# Altium PCB PCB.PcbDoc
Units mm, origin at the board's own origin, x right, y up, seen from the top; angles counter-clockwise.
Board outline 90 x 77.44 mm, 2 copper layers (Top Layer, Bottom Layer); 78 components, 54 nets, 235 pads, 64 vias.
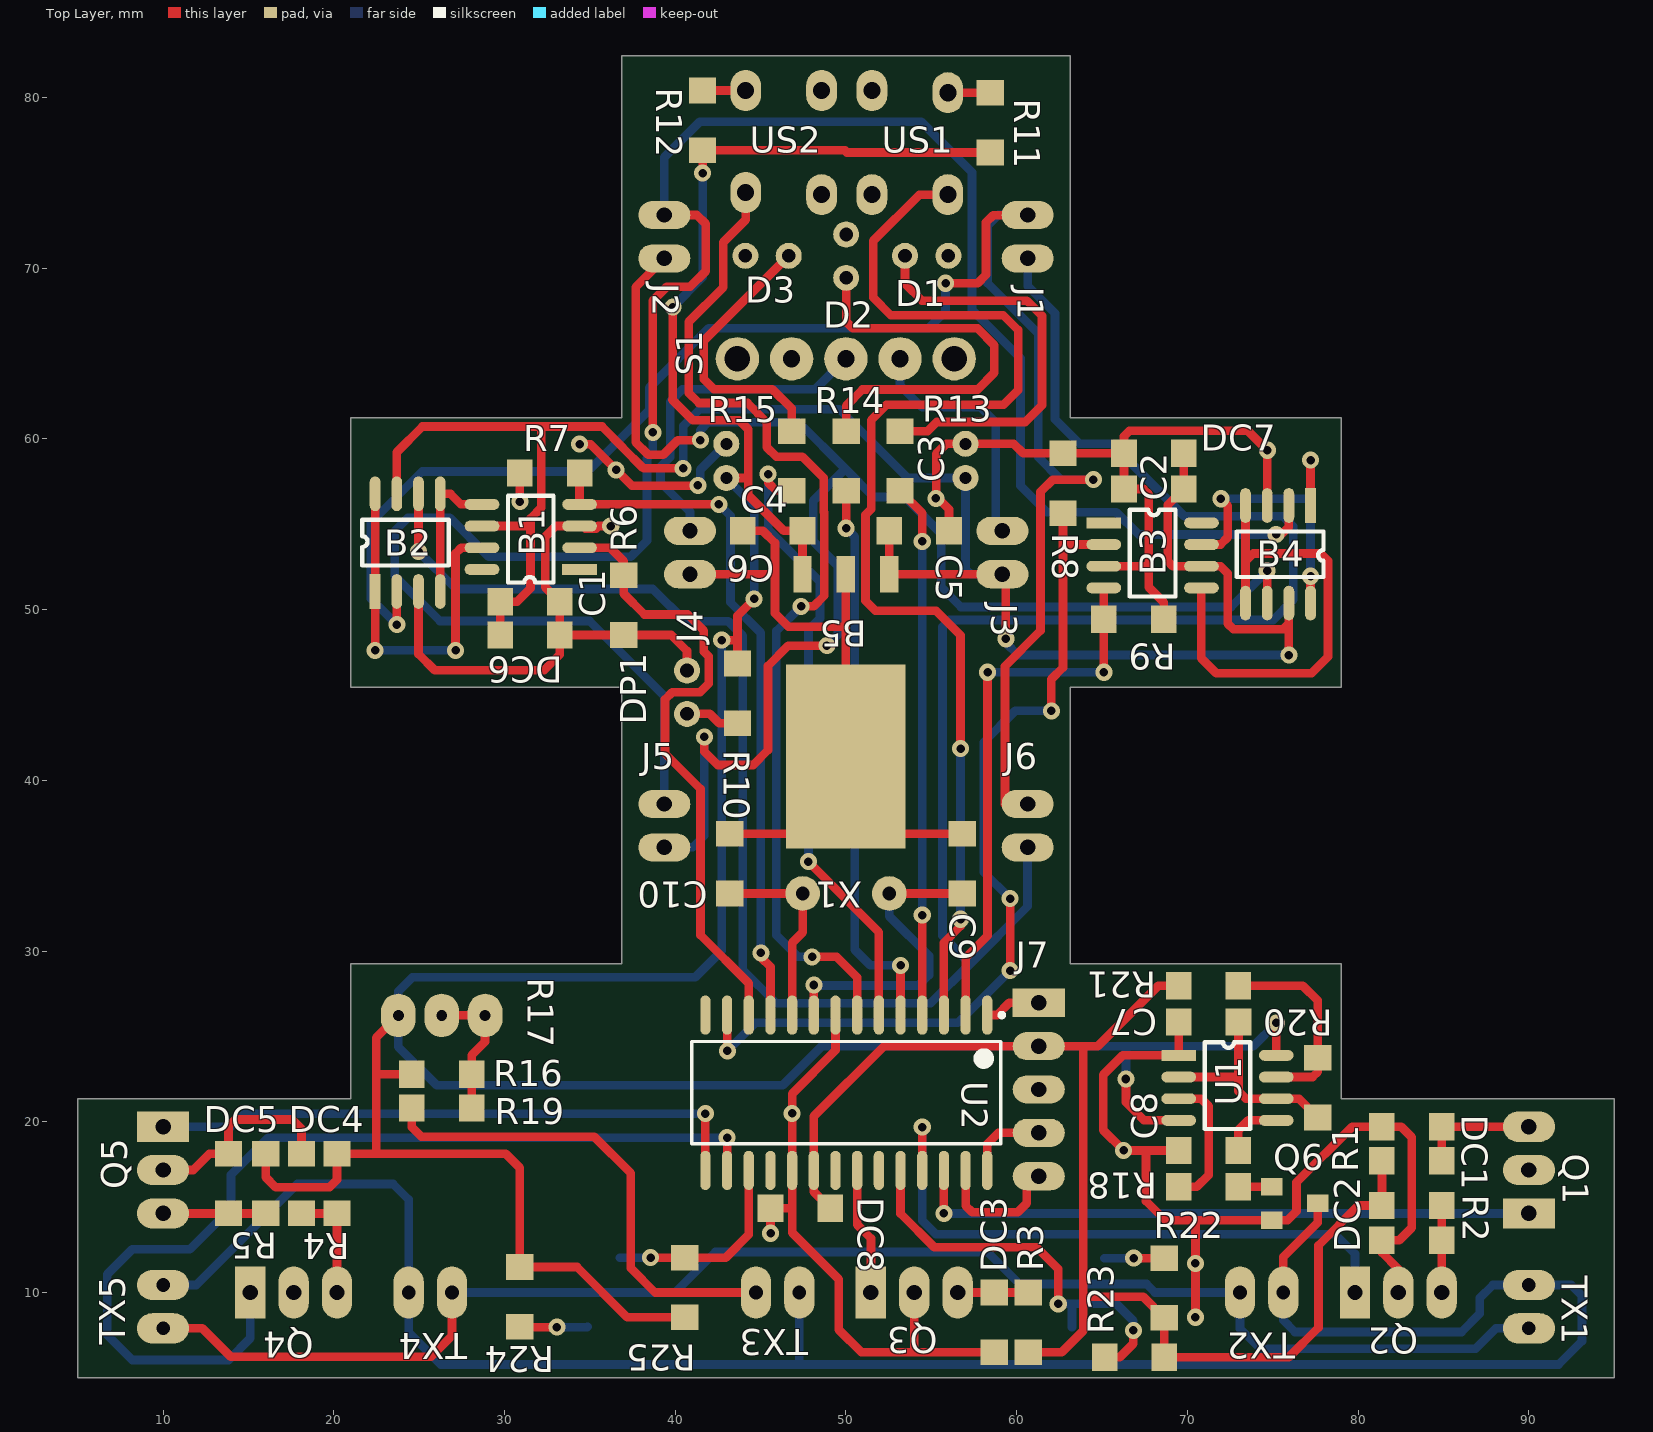
[diagram p0: Top Layer view]
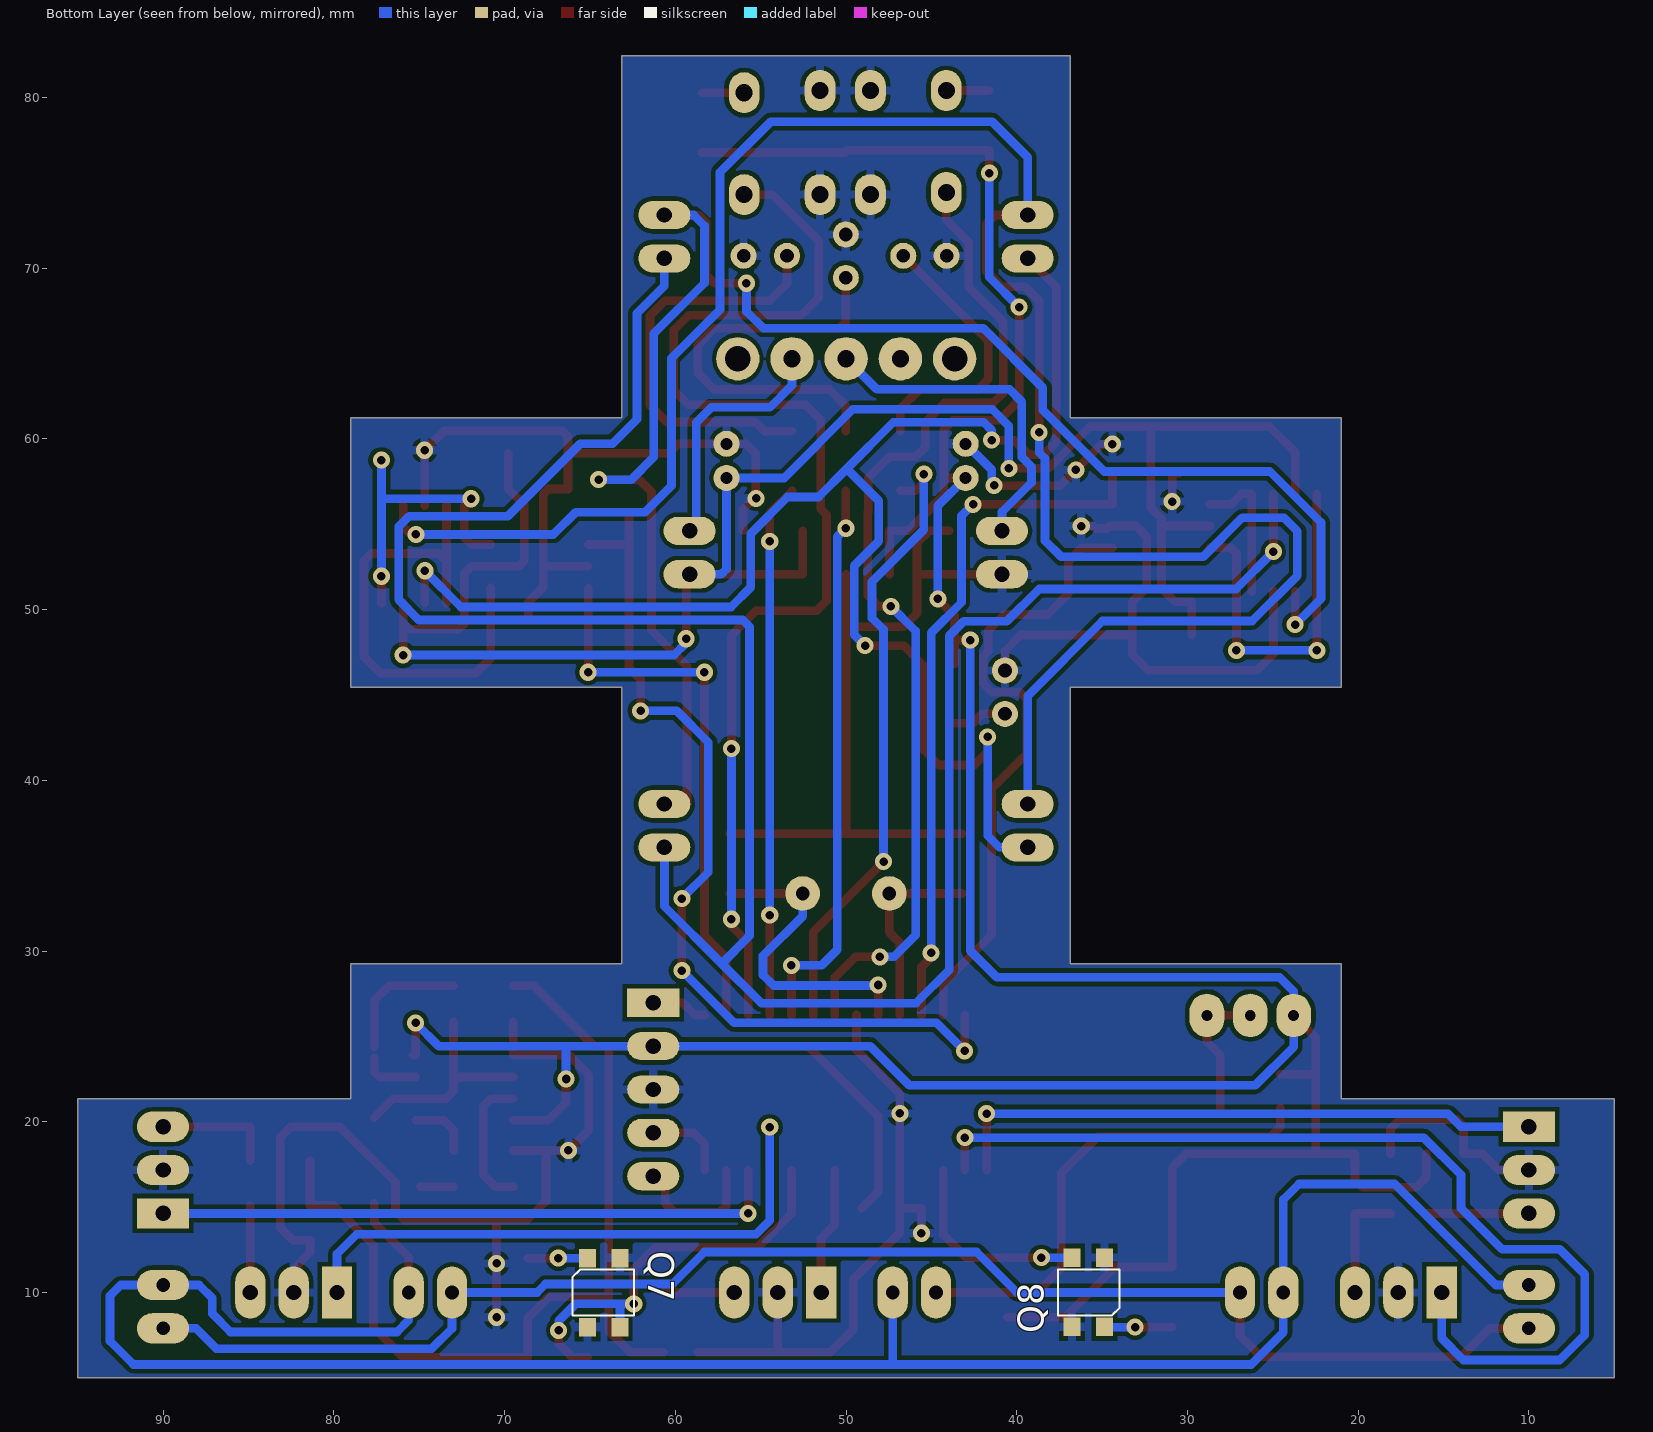
[diagram p1: Bottom Layer view, seen from below]
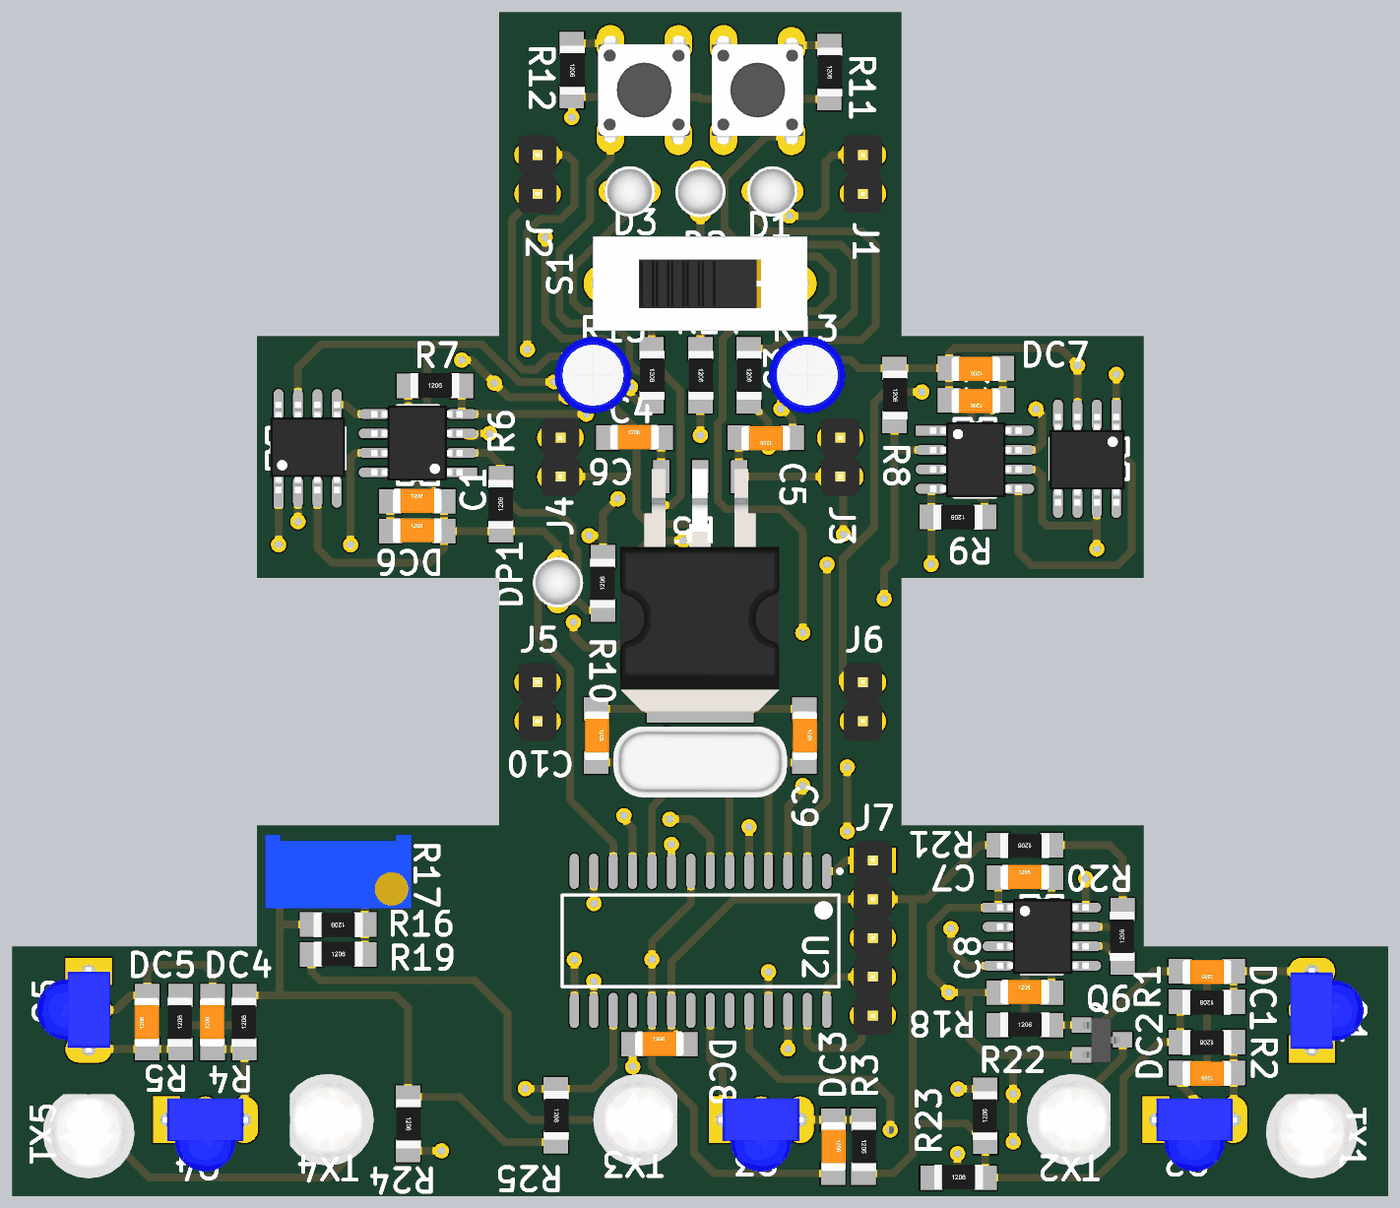
[diagram p2: 3D render of the assembled board from above, using the file's embedded part models]

## Layer stack, top to bottom
Top Solder: solder mask 0.0102, Solder Resist, Dk 3.5
Top Layer: signal copper 0.0356
Dielectric 1: dielectric 0.32, FR-4, Dk 4.8
Bottom Layer: signal copper 0.0356
Bottom Solder: solder mask 0.0102, Solder Resist, Dk 3.5

## Board outline
5,5 5,21.34 21,21.34 21,29.24 36.86,29.24 36.86,45.44 21,45.44 21,61.24 36.86,61.24 36.86,82.44 63.14,82.44 63.14,61.24 79,61.24 79,45.44 63.14,45.44 63.14,29.24 79,29.24 79,21.34 95,21.34 95,5

## Design rules (kind name [scope] priority, off if disabled: settings)
Clearance [All] p1: gap=0.254
HoleSize [All] p1: absolutevalues=TRUE maxlimit=6.3 minlimit=0.2 maxpercent=80.000 minpercent=20.000
MinimumAnnularRing [All] p1: minimumring=0.076
PlaneConnect [All] p1: planeconnectstyle=Relief reliefexpansion=0.508 reliefentries=4 reliefconductorwidth=0.508 reliefairgap=0.254
PolygonConnect [All] p1: connectstyle=Relief reliefconductorwidth=0.508 reliefentries=4 polygonreliefangle="90 Angle" airgapwidth=0.254
RoutingVias [All] p1: holewidth=0.5 width=1 viastyle="Through Hole" minholewidth=0.2 minwidth=0.45 maxholewidth=1 maxwidth=1.27
SolderMaskExpansion [All] p1: expansion=0.102
Width [All] p1: maxlimit=1.27 minlimit=0.127 preferedwidth=0.508
28 further rules are at their usual default settings.

## Components (designator, comment, footprint, x,y, rotation, side; value= is the part's Value field where it differs from the comment)
B1 "IX4427" SOIC-8 39.856,52.35 r180 top
B2 "ZXMHC3F381N8" SOIC-8 22.42,45.599 r90 top
B3 "IX4427" SOIC-8 59.644,55.08 r0 top
B4 "ZXMHC3F381N8" SOIC-8 77.21,61.556 r270 top
B5 "LM2940" TO-263 49.99,44.444 r180 top
C1 "CAP-CER" C1206 31.49,50.45 r0 top
C2 "CAP-CER" C1206 68.03,57.06 r180 top
C3 "CAP-ELEC" CAP-ELEC-5x11x2mm 57,58.71 r90 top
C4 "CAP-ELEC" CAP-ELEC-5x11x2mm 42.99,58.71 r90 top
C5 "CAP-CER" C1206 54.28,54.61 r180 top
C6 "CAP-CER" C1206 45.7,54.61 r0 top
C7 "CAP-CER" C1206 71.24,25.84 r0 top
C8 "CAP-CER" C1206 71.23,18.32 r0 top
C9 "CAP-CER" C1206 56.81,35.12 r270 top
C10 "CAP-CER" C1206 43.2,35.12 r270 top
D1 "LED" LED-3MM-RED 54.725,70.72 r0 top
D2 "LED" LED-3MM-YELLOW 50.01,70.7 r90 top
D3 "LED" LED-3MM-GREEN 45.375,70.72 r180 top
DC1 "CAP-CER" C1206 83.14,19.71 r180 top
DC2 "CAP-CER" C1206 83.14,13.06 r180 top
DC3 "CAP-CER" C1206 58.69,8.25 r270 top
DC4 "CAP-CER" C1206 18.11,16.38 r90 top
DC5 "CAP-CER" C1206 13.83,16.38 r90 top
DC6 "CAP-CER" C1206 31.49,48.51 r0 top
DC7 "CAP-CER" C1206 68.03,59.15 r180 top
DC8 "CAP-CER" C1206 47.33,14.94 r0 top
DP1 "LED" LED-3MM-RED 40.69,45.16 r90 top
J1 "MOTOR DERECHO 1" "HEADER 1x2" 60.64,71.84 r0 top
J2 "MOTOR IZQUIERDO 1" "HEADER 1x2" 39.36,71.84 r0 top
J3 "BATERIA 1" "HEADER 1x2" 59.16,53.34 r180 top
J4 "BATERIA 2" "HEADER 1x2" 40.86,53.34 r0 top
J5 "MOTOR IZQUIERDO 2" "HEADER 1x2" 39.36,37.34 r0 top
J6 "MOTOR DERECHO 2" "HEADER 1x2" 60.64,37.34 r0 top
J7 "PICkit" "Header 1x5" 61.29,26.97 r0 top
Q1 "TSSP58038" TSSP58038 90,14.63 r180 top
Q2 "TSSP58038" TSSP58038 79.81,10 r90 top
Q3 "TSSP58038" TSSP58038 51.46,10 r90 top
Q4 "TSSP58038" TSSP58038 15.11,10 r90 top
Q5 "TSSP58038" TSSP58038 10,19.71 r0 top
Q6 "MMBT2222A" SOT-23 78.138,22.215 r270 top
Q7 "QRE1113GR" QRE1113GR 64.175,10 r270 bottom
Q8 "QRE1113GR" QRE1113GR 35.825,10 r90 bottom
R1 "RES" R1206 83.14,17.71 r180 top
R2 "RES" R1206 83.14,15.09 r180 top
R3 "RES" R1206 60.68,8.25 r270 top
R4 "RES" R1206 20.19,16.38 r90 top
R5 "RES" R1206 16.01,16.38 r90 top
R6 "RES" R1206 36.98,50.26 r90 top
R7 "RES" R1206 32.645,58 r0 top
R8 "RES" R1206 62.71,57.4 r270 top
R9 "RES" R1206 66.855,49.44 r180 top
R10 "RES" R1206 43.64,45.09 r90 top
R11 "RES" R1206 58.44,78.523 r270 top
R12 "RES" R1206 41.6,78.65 r270 top
R13 "RES" R1206 53.165,58.7 r270 top
R14 "RES" R1206 50.01,58.7 r270 top
R15 "RES" R1206 46.815,58.7 r270 top
R16 "RES" R1206 26.32,22.78 r180 top
R17 "POT" TRIMPOT 26.32,26.23 r180 top
R18 "RES" R1206 71.23,16.19 r0 top
R19 "RES" R1206 26.32,20.81 r0 top
R20 "RES" R1206 77.63,22 r90 top
R21 "RES" R1206 71.23,27.97 r180 top
R22 "RES" R1206 68.645,10.26 r90 top
R23 "RES" R1206 66.895,6.21 r0 top
R24 "RES" R1206 30.89,9.74 r270 top
R25 "RES" R1206 40.55,10.29 r270 top
S1 "SLIDE-SWITCH" SWITCH 49.99,64.69 r180 top
TX1 "LED" LED-5MM-CLEAR 90,9.17 r90 top
TX2 "LED" LED-5MM-CLEAR 74.35,10 r0 top
TX3 "LED" LED-5MM-CLEAR 46,10 r0 top
TX4 "LED" LED-5MM-CLEAR 25.65,10 r180 top
TX5 "LED" LED-5MM-CLEAR 10,9.17 r90 top
U1 "555" SOIC-8 64.024,23.89 r0 top
U2 "PIC18F2550" SOIC-SO28_N 50.02,21.7 r270 top
US1 "BUTTON" TACT_SWITCH-SMALL-4PIN 55.965,74.304 r90 top
US2 "BUTTON" TACT_SWITCH-SMALL-4PIN 44.125,80.4 r270 top
X1 "XTAL" HC-49/S 50,33.37 r0 top

## Footprints (in the part's own frame and the unit in brackets; to place one, negate y for a bottom-side part, rotate by r counter-clockwise, add the part's x,y. Pads: shape width x height; smd on the part's side, far side on the other; paste and mask are expansions set on the pad)
C1206 [mm]
  rect 1.5x1.6 smd: 1(-1.75,0) 2(1.75,0)
  body extent -1.6,-0.76 1.6,0.84, height 1.26
CAP-ELEC-5x11x2mm [mm]
  round 1.524 hole 0.7: 1(-1,0) 2(1,0)
  body extent -2.53,-2.53 2.52,2.53, height 11.53
HC-49/S [mil]
  round 80 hole 31.5: 1(-100,0) 2(100,0)
  body extent -223,-90 223,93, height 138
"HEADER 1x2" [mil]
  oval 120x65 hole 35.43: 1(0,50) 2(0,-50)
  body extent -49,-100 49,100, height 336
"Header 1x5" [mil]
  rect 120x65 hole 35.43: 1(0,0)
  oval 120x65 hole 35.43: 2(0,-100) 3(0,-200) 4(0,-300) 5(0,-400)
  body extent -49,-450 49,50, height 336
LED-3MM-GREEN [mil]
  round 60 hole 31.5: A(-50,0) K(50,0)
  body extent -66,-65 64,65, height 217
LED-3MM-RED [mil]
  round 60 hole 31.5: A(-50,0) K(50,0)
  body extent -66,-65 64,65, height 217
LED-3MM-YELLOW [mil]
  round 60 hole 31.5: A(-50,0) K(50,0)
  body extent -66,-65 64,65, height 217
LED-5MM-CLEAR [mil]
  oval 70x120 hole 31.5: A(-50,0) K(50,0)
  body extent -118,-118 98,118, height 346
QRE1113GR [mm]
  rect 1.1x1 smd: A(-2.01,-0.97) C(2.04,0.94) E(-2.01,0.94) K(2.04,-0.97)
  silkscreen extent -1.35,-1.85 1.35,1.75, body extent -2.4,-1.8 2.4,1.8, height 1.83
R1206 [mm]
  rect 1.5x1.6 smd: 1(-1.75,0) 2(1.75,0)
  body extent -1.6,-0.76 1.6,0.84, height 0.68
SOIC-8 [mil]
  rect 80x25 smd: 1(215,0)
  oval 80x25 smd: 2(215,-50) 3(215,-100) 4(215,-150) 5(440,-150) 6(440,-100) 7(440,-50) 8(440,0)
  silkscreen extent 275,-170 380,30, body extent 212,-171 448,21, height 69
SOIC-SO28_N [mm] "SOIC, 28-Leads, Body 17.9x7.5mm, Pitch 1.27mm, IPC Medium Density"
  oval 2.3x0.6 smd: 1(-4.55,8.255) 2(-4.55,6.985) 3(-4.55,5.715) 4(-4.55,4.445) 5(-4.55,3.175) 6(-4.55,1.905) 7(-4.55,0.635) 8(-4.55,-0.635) 9(-4.55,-1.905) 10(-4.55,-3.175) 11(-4.55,-4.445) 12(-4.55,-5.715) 13(-4.55,-6.985) 14(-4.55,-8.255) 15(4.55,-8.255) 16(4.55,-6.985) 17(4.55,-5.715) 18(4.55,-4.445) 19(4.55,-3.175) 20(4.55,-1.905) 21(4.55,-0.635) 22(4.55,0.635) 23(4.55,1.905) 24(4.55,3.175) 25(4.55,4.445) 26(4.55,5.715) 27(4.55,6.985) 28(4.55,8.255)
  silkscreen extent -4.67,-9.05 3,9.23, body extent -3.8,-9.06 3.8,9.06, height 2.65
SOT-23 [mil]
  rect 40x50 smd: B(237.2,-125.99) C(275,-20) E(313.98,-125.99)
  body extent 218,-124 333,-27, height 38
SWITCH [mm]
  round 2.54 hole 1: 1(-3.175,0) 2(0,0) 3(3.175,0)
  round 2.54 hole 1.5: 4(-6.35,0) 4(6.35,0)
  body extent -7,-3.1 7,3.1, height 9.65
TACT_SWITCH-SMALL-4PIN [mm]
  oval 2.4x1.8 hole 1: 1(0,4.445) 1(6.096,4.445) 2(0,0) 2(5.969,0)
  body extent -0.94,-0.79 7.04,5.21, height 5.15
TO-263 [mil]
  rect 42x85 smd: 1(-100,-300.25) 2(0,-300.25) 3(100,-300.25)
  rect 275x425 smd: 2(0,120.25)
  body extent -204,-320 205,304, height 181
TRIMPOT [mil]
  oval 80x100 hole 25: 1(-100,0) 2(0,0) 3(100,0)
  body extent -188,-94 188,94, height 455
TSSP58038 [mil]
  rect 120x70 hole 35.43: 1(0,0)
  oval 120x70 hole 35.43: 2(0,-100) 3(0,-200)
  body extent -134,-213 55,15, height 337

## Part data
B1 B3: library part 4427
J1 J2 J3 J4 J5 J6: library part "Header 1x2"
Q6: library part NPN

## Via types
v1: diameter 1, hole 0.5, Top Layer to Bottom Layer, 64 vias

## Nets (pads, with @x,y where several pads share a name; then routed paths per layer and width w, separated by ;. In a path a pad name is that pad's centre, name@x,y a point inside that pad or via, vN(x,y) a via of type N, cw(c..) or ccw(c..) an arc to the next point about the centre after c; other vN are vias at no path point)
38K: R18.1 U1.3 | length 8
  Top Layer w0.508: R18.1 70.546,16.19 71.24,16.884 71.24,20.911 70.801,21.35 U1.3
BTN1: R11.1 U2.3 US1.2 | length 74.1
  Top Layer w0.508: U2.3 55.735,30.486 56.71,31.461 v1(56.71,31.86) ; US1.2@55.965,75.184 55.965,74.304 54.304,74.304 51.595,71.595 51.595,68.275 52.641,67.23 59.22,67.23 60.08,66.37 60.08,62.85 59.231,62.001 52.375,62.001 51.47,61.097 51.47,55.88 51.14,55.55 51.14,50.52 51.724,49.936 55.27,49.936 56.71,48.497 v1(56.71,41.86) ; US1.2@55.965,80.273 R11.1
  Bottom Layer w0.508: v1(56.71,31.86) v1(56.71,41.86)
BTN2: R12.1 U2.7 US2.2 | length 62.8
  Top Layer w0.508: R12.1 US2.2@44.125,80.4 ; US2.2@44.125,74.447 44.125,74.431 44.125,72.835 42.81,71.52 42.81,68.87 40.79,66.85 40.79,62.69 41.385,62.095 44.229,62.095 45.364,60.96 45.364,59.513 45.923,58.955 47.446,58.955 48.692,57.709 48.692,55.702 48.717,55.702 48.717,50.8 48.108,50.19 v1(47.371,50.19) ; v1(48.01,29.66) 49.443,29.66 50.655,28.448 U2.7
  Bottom Layer w0.508: v1(47.371,50.19) 45.923,48.743 45.923,30.923 47.186,29.66 v1(48.01,29.66)
CNY1: Q7.C R23.1 U2.24 | length 24.7
  Top Layer w0.508: U2.24 53.195,14.63 55.175,12.65 61.162,12.65 62.433,11.379 v1(62.433,9.336) ; R23.1 66.04,6.21 66.83,7 v1(66.83,7.78)
  Bottom Layer w0.508: v1(62.433,9.336) 63.235,9.336 ; Q7.C 63.235,9.336 ; v1(66.83,7.78) 66.83,8.343 65.837,9.336 63.235,9.336
CNY2: Q8.C R25.1 U2.17 | length 11.9
  Top Layer w0.508: v1(38.557,12.04) R25.1 42.95,12.04 44.305,13.395 U2.17
  Bottom Layer w0.508: Q8.C v1(38.557,12.04)
GND: B1.3 B2.3 B3.3 B4.3 B5.2 C1.2 C2.2 C3.2 C4.2 C5.1 C6.1 C7.1 C8.1 C9.1 C10.1 D1.K D2.K D3.K DC1.2 DC2.2 DC3.2 DC4.2 DC5.2 DC6.2 DC7.2 DC8.1 DP1.K J4.2 J7.3 Q1.2 Q2.2 Q3.2 Q4.2 Q5.2 Q6.E Q7.E Q7.K Q8.E Q8.K R6.1 R7.1 R8.1 R9.1 U1.1 U2.8 U2.19 US1.1 US2.1 | length 236.8
  Top Layer w0.508: Q5.2 11.76,17.17 12.72,18.13 DC5.2 13.83,19.73 14.23,20.13 17.57,20.13 18.11,19.59 DC4.2 ; B2.3 24.96,47.4 25.92,46.44 32.31,46.44 33.24,47.37 DC6.2 ; R7.1@30.48,58 R7.1 v1(30.895,56.325) ; v1(34.4,59.69) 35.03,59.69 v1(36.54,58.18) 37.46,57.26 41.32,57.26 v1(41.33,57.27) ; v1(36.22,54.89) 35.502,54.89 35.36,54.748 34.729,54.748 34.587,54.89 B1.3 33,54.89 32.38,54.27 32.38,51.31 C1.2 DC6.2 ; DP1.K 40.69,47.577 39.757,48.51 R6.1 DC6.2 ; J4.2 45.84,52.07 ; C10.1 B5.2@49.99,36.87 ; C6.1 45.13,54.61 45.84,53.9 45.84,52.07 ; v1(45.58,13.47) DC8.1 46.845,14.94 ; U2.8 49.385,24.185 46.845,21.645 U2.19 46.845,14.94 ; B5.2@49.99,52.07 49.99,48.99 ; Q3.2 54,6.5 ; C5.1 56.03,55.87 55.29,56.61 55.29,59.12 55.88,59.71 C3.2 59.816,59.71 60.376,59.15 R8.1 DC7.2 ; C9.1 B5.2@49.99,36.87 ; DC3.2 54,6.5 ; B3.3 67.73,52.54 ; R9.1 68.605,50.435 67.73,51.31 67.73,52.54 ; C8.1 67.57,18.32 ; C7.1 69.485,25.835 U1.1 66.206,23.89 65.075,22.758 65.075,19.507 v1(66.262,18.32) 67.57,18.32 ; v1(70.47,8.55) v1(70.47,11.7) 70.47,14.24 ; B4.3 74.67,59.334 73.527,60.477 66.61,60.477 66.28,60.147 DC7.2 ; Q2.2 82.35,11.38 81.39,12.34 DC2.2 82.41,13.06 83.14,13.79 83.14,19.1 82.53,19.71 DC1.2 79.65,19.71 76.39,16.45 76.39,14.76 75.87,14.24 Q6.E 70.47,14.24 ; 45.84,52.07 45.84,49.783 46.633,48.99 49.99,48.99 ; 46.845,14.94 46.845,13.505 49.581,10.769 49.581,7.823 50.904,6.5 54,6.5 ; B5.2@49.99,36.87 49.99,41.389 49.99,48.99 ; DC7.2 C2.2 67.43,57.06 67.73,56.76 67.73,52.54 ; 67.57,18.32 67.57,15.36 68.69,14.24 70.47,14.24
  Bottom Layer w0.508: v1(41.33,57.27) 41.47,57.41 41.47,58.19 C4.2
  other v1: 46.84,20.49 55.27,56.51 74.68,59.33
IR1: Q1.1 U2.26 | length 36.8
  Top Layer w0.508: v1(55.735,14.63) U2.26
  Bottom Layer w0.508: v1(55.735,14.63) Q1.1
IR2: Q2.1 U2.25 | length 36.4
  Top Layer w0.508: U2.25 v1(54.465,19.682)
  Bottom Layer w0.508: v1(54.465,19.682) 54.465,14.215 55.26,13.42 78.64,13.42 79.81,12.25 Q2.1
IR3: Q3.1 U2.22 | length 7.5
  Top Layer w0.508: U2.22 50.655,13.962 51.46,13.157 Q3.1
IR4: Q4.1 U2.16 | length 58.4
  Top Layer w0.508: U2.16 v1(43.035,19.07)
  Bottom Layer w0.508: Q4.1 15.11,7.315 13.845,6.05 8.19,6.05 6.73,7.51 6.73,11.07 8.19,12.53 11.57,12.53 13.98,14.94 13.98,16.89 16.16,19.07 v1(43.035,19.07)
IR5: Q5.1 U2.15 | length 35.4
  Top Layer w0.508: U2.15 v1(41.765,20.472)
  Bottom Layer w0.508: Q5.1 13.98,19.71 14.742,20.472 v1(41.765,20.472)
LED1: R13.2 U2.4 | length 31.2
  Top Layer w0.508: R13.2 54.465,55.65 v1(54.465,53.993) ; U2.4 v1(54.465,32.106)
  Bottom Layer w0.508: v1(54.465,32.106) v1(54.465,53.993)
LED2: R14.2 U2.5 | length 33.1
  Top Layer w0.508: v1(50.01,54.762) R14.2 ; U2.5 v1(53.195,29.159)
  Bottom Layer w0.508: v1(50.01,54.762) 50.513,54.26 50.513,30.074 51.427,29.159 v1(53.195,29.159)
LED3: R15.2 U2.6 | length 37
  Top Layer w0.508: v1(45.441,57.937) 45.441,57.433 45.923,56.95 R15.2 ; v1(47.802,35.232) 51.925,31.109 U2.6
  Bottom Layer w0.508: v1(45.441,57.937) 45.441,54.669 48.48,51.63 48.48,49.51 47.802,48.832 v1(47.802,35.232)
MD_DIR: B1.4 R7.2 U2.11 | length 41.2
  Top Layer w0.508: R7.2 B1.4 v1(42.56,56.16) ; v1(45.01,29.89) 45.01,29.641 45.575,29.076 U2.11
  Bottom Layer w0.508: v1(42.56,56.16) 43.23,55.49 43.23,50.42 45.01,48.64 v1(45.01,29.89)
MD_PWM: B1.2 R6.2 U2.12 | length 37.1
  Top Layer w0.508: B1.2 36.192,53.62 36.98,52.832 36.98,50.929 38.202,49.708 40.724,49.708 41.664,48.768 41.664,47.549 41.961,47.252 41.961,45.668 41.453,45.16 39.827,45.16 39.395,44.728 39.395,41.575 41.481,39.489 41.481,30.939 44.305,28.115 U2.12
MI_DIR: B3.4 R9.2 U2.2 | length 32.4
  Top Layer w0.508: U2.2 57.005,29.598 58.293,30.886 v1(58.293,46.33) ; v1(65.105,46.33) R9.2 B3.4
  Bottom Layer w0.508: v1(58.293,46.33) v1(65.105,46.33)
MI_PWM: B3.2 R8.2 U2.13 | length 53.6
  Top Layer w0.508: U2.13 43.035,24.165 v1(43.05,24.15) ; v1(59.614,28.854) v1(59.614,33.071) ; v1(62.027,44.069) 62.027,45.923 62.71,46.606 62.71,53.81 ; R8.2 62.71,53.81 ; B3.2 62.71,53.81
  Bottom Layer w0.508: v1(43.05,24.15) 44.69,25.79 56.549,25.79 v1(59.614,28.854) ; v1(59.614,33.071) 58.06,34.625 58.06,42.21 59.919,44.069 v1(62.027,44.069)
NetB1_5: B1.5 B2.4 B2.5 | length 8.4
  Top Layer w0.508: B2.4 B2.5 26.835,56.775 27.45,56.16 B1.5
NetB1_7: B1.7 B2.1 B2.8 | length 21.2
  Top Layer w0.508: v1(22.42,47.61) B2.1 B2.8 ; v1(27.13,47.61) 27.13,53.28 27.47,53.62 B1.7
  Bottom Layer w0.508: v1(22.42,47.61) v1(27.13,47.61)
NetB2_2: B2.2 J1.1 J6.1 | length 103
  Top Layer w0.508: v1(23.69,49.12) B2.2 ; v1(55.829,69.113) 57.709,69.113 58.2,69.605 58.2,72.68 58.617,73.097 J1.1@60.574,73.097 ; J6.1 59.309,38.61 59.309,46.685 61.392,48.768 61.392,56.896 62.103,57.607 v1(64.491,57.607)
  Bottom Layer w0.508: v1(23.69,49.12) 22.18,50.63 22.18,55.098 25.171,58.09 34.87,58.09 38.47,61.69 38.47,62.99 41.952,66.472 54.839,66.472 55.829,67.462 v1(55.829,69.113) ; J1.1 58.928,73.11 58.29,72.472 58.29,69.13 61.27,66.15 61.27,58.923 62.586,57.607 v1(64.491,57.607)
NetB2_6: B2.6 J1.2 J6.2 | length 139.8
  Top Layer w0.508: B2.6 24.96,53.399 v1(24.968,53.391)
  Bottom Layer w0.508: v1(24.968,53.391) 27.153,51.206 38.684,51.206 40.581,49.309 43.111,49.309 43.96,48.46 43.96,28.89 45.901,26.949 54.966,26.949 57.277,29.261 ; J6.2 60.63,36.07 60.63,32.614 57.277,29.261 ; J1.2 60.64,68.95 62.24,67.35 62.24,61.153 63.673,59.72 65.57,59.72 69.816,55.474 75.59,55.474 76.198,54.866 76.198,50.569 75.019,49.39 56.045,49.39 55.651,48.997 55.651,30.886 57.277,29.261
NetB3_5: B3.5 B4.4 B4.5 | length 28.8
  Top Layer w0.508: B3.5 70.815,51.27 70.815,47.142 71.692,46.266 77.264,46.266 78.23,47.232 78.23,52.86 77.803,53.287 73.855,53.287 73.4,52.832 ; B4.5 73.4,52.832 ; B4.4 73.4,52.832
NetB3_7: B3.7 B4.1 B4.8 | length 20.9
  Top Layer w0.508: B3.7 71.933,53.81 72.365,54.242 72.365,56.083 v1(71.958,56.49) ; B4.8 v1(77.21,51.95) ; B4.1 v1(77.21,58.75)
  Bottom Layer w0.508: v1(71.958,56.49) 77.21,56.49 ; v1(77.21,51.95) 77.21,56.04 ; v1(77.21,58.75) 77.21,56.49 ; 77.21,56.04 77.21,56.49 ; 77.21,56.04 77.21,56.49
NetB4_2: B4.2 J2.1 J5.1 | length 128.9
  Top Layer w0.508: v1(38.69,60.38) 38.69,68.078 38.684,68.084 39.506,68.906 40.866,68.906 41.78,69.82 41.78,72.59 41.26,73.11 J2.1 ; v1(75.19,54.4) 75.5,54.4 75.94,54.84 B4.2
  Bottom Layer w0.508: v1(38.69,60.38) 38.69,59.2 38.34,58.85 38.34,54.037 37.389,53.086 29.083,53.086 26.799,55.37 24.35,55.37 23.56,54.58 23.56,51.98 26.213,49.327 34.973,49.327 39.36,44.94 J5.1 ; J2.1 39.36,76.5 41.44,78.58 54.414,78.58 57.379,75.616 57.379,67.561 60.22,64.72 60.22,57.255 61.773,55.702 65.837,55.702 67.139,54.4 v1(75.19,54.4)
NetB4_6: B4.6 J2.2 J5.2 | length 93.5
  Top Layer w0.508: J2.2 37.676,68.886 37.676,59.804 38.41,59.07 39.29,59.07 40.14,59.92 v1(41.47,59.92) ; v1(41.707,42.545) 41.707,41.673 42.48,40.9 44.56,40.9 45.43,41.77 45.43,46.696 46.624,47.89 v1(48.88,47.89) ; B4.6 v1(74.67,52.273)
  Bottom Layer w0.508: J5.2 41.01,36.07 41.707,36.767 v1(41.707,42.545) ; v1(41.47,59.92) 41.47,60.51 41.94,60.98 47.218,60.98 49.954,58.244 ; v1(48.88,47.89) 49.51,48.52 49.51,52.573 48.082,54 48.082,56.372 49.954,58.244 ; v1(74.67,52.273) 72.549,50.152 56.738,50.152 55.58,51.31 55.58,54.44 53.429,56.591 51.607,56.591 49.954,58.244
NetC7_2: C7.2 R20.1 U1.2 U1.6 | length 12.8
  Top Layer w0.508: U1.2 72.99,22.62 ; C7.2 72.99,22.62 ; R20.1 76.53,21.35 U1.6 73.43,21.35 72.99,21.79 72.99,22.62
NetC8_2: C8.2 U1.5 | length 3.6
  Top Layer w0.508: C8.2 72.98,19.507 73.553,20.08 U1.5
NetD1_A: D1.A R13.1 | length 24.6
  Top Layer w0.508: R13.1 54.78,60.45 55.315,60.985 60.495,60.985 61.48,61.97 61.48,67.21 60.593,68.097 54.446,68.097 53.455,69.088 D1.A
NetD2_A: D2.A R14.1 | length 24.4
  Top Layer w0.508: R14.1 50.01,61.94 50.96,62.89 57.709,62.89 58.69,63.872 58.69,65.487 57.709,66.468 50.394,66.468 50.01,66.852 D2.A
NetD3_A: D3.A R15.1 | length 16.5
  Top Layer w0.508: D3.A 41.67,65.745 41.67,63.508 42.266,62.912 45.676,62.912 46.815,61.773 R15.1
NetDC1_1: DC1.1 Q1.3 R1.1 | length 7.1
  Top Layer w0.508: R1.1 DC1.1 Q1.3
NetDC2_1: DC2.1 Q2.3 R2.1 | length 5.1
  Top Layer w0.508: Q2.3 DC2.1 R2.1
NetDC3_1: DC3.1 Q3.3 R3.1 | length 4.1
  Top Layer w0.508: Q3.3 DC3.1 R3.1
NetDC4_1: DC4.1 Q4.3 R4.1 | length 6.7
  Top Layer w0.508: DC4.1 R4.1 Q4.3
NetDC5_1: DC5.1 Q5.3 R5.1 | length 6
  Top Layer w0.508: Q5.3 DC5.1 R5.1
NetDP1_A: DP1.A R10.1 | length 3.2
  Top Layer w0.508: DP1.A 42.02,43.89 42.57,43.34 R10.1
NetJ3_2: J3.2 S1.1 | length 14.8
  Bottom Layer w0.508: S1.1 53.165,63.134 54.458,61.842 57.894,61.842 58.776,60.96 58.776,54.61 J3.2
NetJ4_1: J4.1 S1.2 | length 19.9
  Bottom Layer w0.508: J4.1 40.86,55.71 39.13,57.44 39.13,58.362 39.7,58.932 39.7,62.179 40.421,62.9 48.2,62.9 S1.2
NetQ6_B: Q6.B R18.2 | length 2
  Top Layer w0.508: R18.2 Q6.B
NetQ6_C: Q6.C TX1.K TX2.K TX3.K TX4.K TX5.K | length 129.3
  Top Layer w0.508: TX2.K 75.62,12.09 77.63,14.1 Q6.C
  Bottom Layer w0.508: TX5.K 11.939,10.44 17.856,16.358 23.466,16.358 24.38,15.443 TX4.K 24.38,7.67 26.27,5.78 47.27,5.78 ; TX3.K 47.27,5.78 ; TX2.K 75.62,8.37 76.3,7.69 86.049,7.69 87.122,8.763 87.122,9.672 87.89,10.44 TX1.K 92.48,10.44 93.11,9.81 93.11,7.16 91.73,5.78 47.27,5.78
NetQ7_A: Q7.A R22.2 | length 3.5
  Top Layer w0.508: v1(66.853,12.01) R22.2
  Bottom Layer w0.508: Q7.A v1(66.853,12.01)
NetQ8_A: Q8.A R24.2 | length 4
  Top Layer w0.508: R24.2 30.91,7.97 v1(33.07,7.97)
  Bottom Layer w0.508: v1(33.07,7.97) 34.835,7.97 Q8.A
NetR16_1: R16.1 R17.1 R17.2 R19.2 | length 8.3
  Top Layer w0.508: R17.2 R17.1 28.86,24.69 28.07,23.9 R16.1 R19.2
NetR19_1: R19.1 TX3.A | length 28.6
  Top Layer w0.508: R19.1 24.57,19.69 25.14,19.12 35.261,19.12 37.389,16.993 37.389,11.43 38.819,10 TX3.A
NetR20_2: R20.2 R21.1 U1.7 | length 11.1
  Top Layer w0.508: R21.1 76.76,27.97 77.63,27.1 R20.2@77.63,24.406 ; U1.7 77.33,22.62 77.63,22.92 R20.2
NetTX1_A: TX1.A TX2.A TX4.A TX5.A | length 88.8
  Top Layer w0.508: TX5.A 12.29,7.9 13.96,6.23 25.69,6.23 26.92,7.46 TX4.A
  Bottom Layer w0.508: TX4.A 39.99,10 42.36,12.37 58.293,12.37 60.163,10.5 67.6,10.5 68.1,10 TX2.A 73.08,7.895 74.275,6.7 86.87,6.7 88.07,7.9 TX1.A
PGC: J7.5 U2.27 | length 8.3
  Top Layer w0.508: U2.27 57.005,15.085 57.39,14.7 60.06,14.7 60.579,15.219 60.579,16.81 J7.5
PGD: J7.4 U2.28 | length 4.8
  Top Layer w0.508: U2.28 58.275,18.697 58.928,19.35 J7.4
VBAT: B1.6 B2.7 B3.6 B4.7 B5.1 C1.1 C2.1 C3.1 C5.2 DC6.1 DC7.1 J3.1 | length 117
  Top Layer w0.508: B2.7 23.69,59.22 25.19,60.72 32.156,60.72 ; B1.6 31.521,54.89 ; DC6.1 C1.1 30.73,50.45 31.521,51.241 31.521,54.89 ; v1(40.462,58.268) 38.158,58.268 38.118,58.308 38.094,58.308 36.914,59.488 36.914,59.512 35.706,60.72 32.156,60.72 ; C5.2 B5.1 J3.1 59.461,52.07 59.36,51.969 v1(59.36,48.29) ; DC7.1 C2.1 68.84,56.12 68.84,52.84 69.14,52.54 B3.6 71.933,52.54 72.365,52.108 72.365,49.174 72.695,48.844 75.61,48.844 75.94,49.174 ; v1(75.94,47.338) 75.94,49.174 ; B4.7 75.94,49.174 ; 31.521,54.89 31.521,55.335 32.156,55.97 32.156,60.72
  Bottom Layer w0.508: v1(40.462,58.268) 40.462,60.757 41.447,61.742 49.586,61.742 53.618,57.71 C3.1 57,52.372 57.302,52.07 J3.1 ; v1(59.36,48.29) 59.36,48.057 60.079,47.338 v1(75.94,47.338)
VCC: B5.3 C4.1 C6.2 DC8.2 J7.2 R1.2 R2.2 R3.2 R4.2 R5.2 R10.2 R11.2 R12.2 R16.2 R17.3 R21.2 R22.1 R23.2 R24.1 R25.2 U1.4 U1.8 U2.20 | length 292.3
  Top Layer w0.508: R5.2 16.01,16.75 16.59,16.17 19.75,16.17 20.19,16.61 R4.2 22.479,18.13 ; R17.3 22.479,24.929 22.479,22.78 ; R16.2 22.479,22.78 ; v1(39.855,67.71) 39.855,62.323 39.82,62.288 41.021,61.087 43.739,61.087 44.272,60.554 44.272,57.71 ; R25.2 37.189,8.54 34.239,11.49 R24.1 30.89,17.314 30.074,18.13 22.479,18.13 ; v1(41.6,75.565) R12.2 49.936,76.9 50.063,76.773 R11.2 ; v1(42.723,48.209) 43.589,48.209 43.64,48.26 ; C4.1 44.272,57.71 ; R10.2 43.64,48.26 ; v1(44.62,50.62) 43.64,49.64 43.64,48.26 ; B5.3 C6.2 46.36,54.61 44.272,56.698 44.272,57.71 ; DC8.2 48.115,15.905 U2.20 48.115,20.32 52.225,24.43 J7.2 63.9,24.43 ; R3.2 62.634,6.5 63.9,7.766 63.9,9.75 ; v1(66.396,22.504) 66.396,21.133 67.448,20.08 U1.4 ; R21.2 68.286,27.97 64.751,24.43 63.9,24.43 ; v1(75.21,25.79) 75.21,23.9 U1.8 U1.8@75.362,23.89 ; R1.2 R2.2 80.01,15.09 77.673,12.753 77.673,7.95 75.933,6.21 R23.2 R22.1 67.405,9.75 63.9,9.75 ; 22.479,18.13 22.479,22.78 ; 63.9,9.75 63.9,24.43
  Bottom Layer w0.508: v1(39.855,67.71) 41.6,69.455 v1(41.6,75.565) ; v1(42.723,48.209) 42.723,30.013 41.17,28.46 24.605,28.46 23.78,27.635 R17.3 23.78,24.384 26.024,22.14 46.295,22.14 48.585,24.43 J7.2 66.396,24.43 ; C4.1 44.62,56.08 v1(44.62,50.62) ; v1(66.396,22.504) 66.396,24.43 ; v1(75.21,25.79) 73.85,24.43 66.396,24.43
VPP: J7.1 U2.1 | length 3.3
  Top Layer w0.508: U2.1 58.84,26.25 59.56,26.97 J7.1
XTAL1: C9.2 U2.9 X1.2 | length 18.8
  Top Layer w0.508: U2.9 48.13,26.265 48.12,26.275 v1(48.12,28.01) ; X1.2 C9.2
  Bottom Layer w0.508: v1@48.12,27.98 54.24,27.98 54.86,28.6 54.86,29.72 52.54,32.04 X1.2
XTAL2: C10.2 U2.10 X1.1 | length 11.6
  Top Layer w0.508: C10.2 X1.1 47.46,31.095 46.845,30.48 U2.10
pads on no net: B1.1 B1.8 B3.1 B3.8 S1.3 S1.4 U2.14 U2.18 U2.21 U2.23

## Polygon pours and split planes (outlines as drawn)
GND on Bottom Layer "GND_L02_P000" (solid, remove dead copper, pour order 0): 5,5 5,21.34 21,21.34 21,29.24 36.86,29.24 36.86,45.44 21,45.44 21,61.24 36.86,61.24 36.86,82.44 63.14,82.44 63.14,61.24 79,61.24 79,45.44 63.14,45.44 63.14,29.24 79,29.24 79,21.34 95,21.34 95,5

## Silkscreen, mask and mechanical layers (free items; w line width, h text height)
Mechanical 1:
  the board outline again, w0.254
Mechanical 11:
  lines w0.254: 5,9.17 10,9.17 ; 5,17.17 10,17.17 ; 17.65,5 17.65,10 ; 25.65,5 25.65,10 ; 35.825,5 35.825,10 ; 36.86,37.34 39.36,37.34 39.36,71.84 36.86,71.84 ; 39.36,53.34 40.86,53.34 ; 46,5 46,10 ; 50,5 50,82.44 ; 54,5 54,10 ; 59.16,53.34 60.66,53.34 ; 63.14,37.34 60.64,37.34 60.64,71.84 63.14,71.84 ; 64.175,5 64.175,10 ; 74.35,5 74.35,10 ; 82.35,5 82.35,10 ; 90,9.17 95,9.17 ; 90,17.17 95,17.17